# Altium PCB GIC_G1.PcbDoc
Units mm, origin at the board's own origin, x right, y up, seen from the top; angles counter-clockwise.
Board outline 50 x 50 mm, 2 copper layers (Top Layer, Bottom Layer); 13 components, 9 nets, 38 pads, 0 vias.
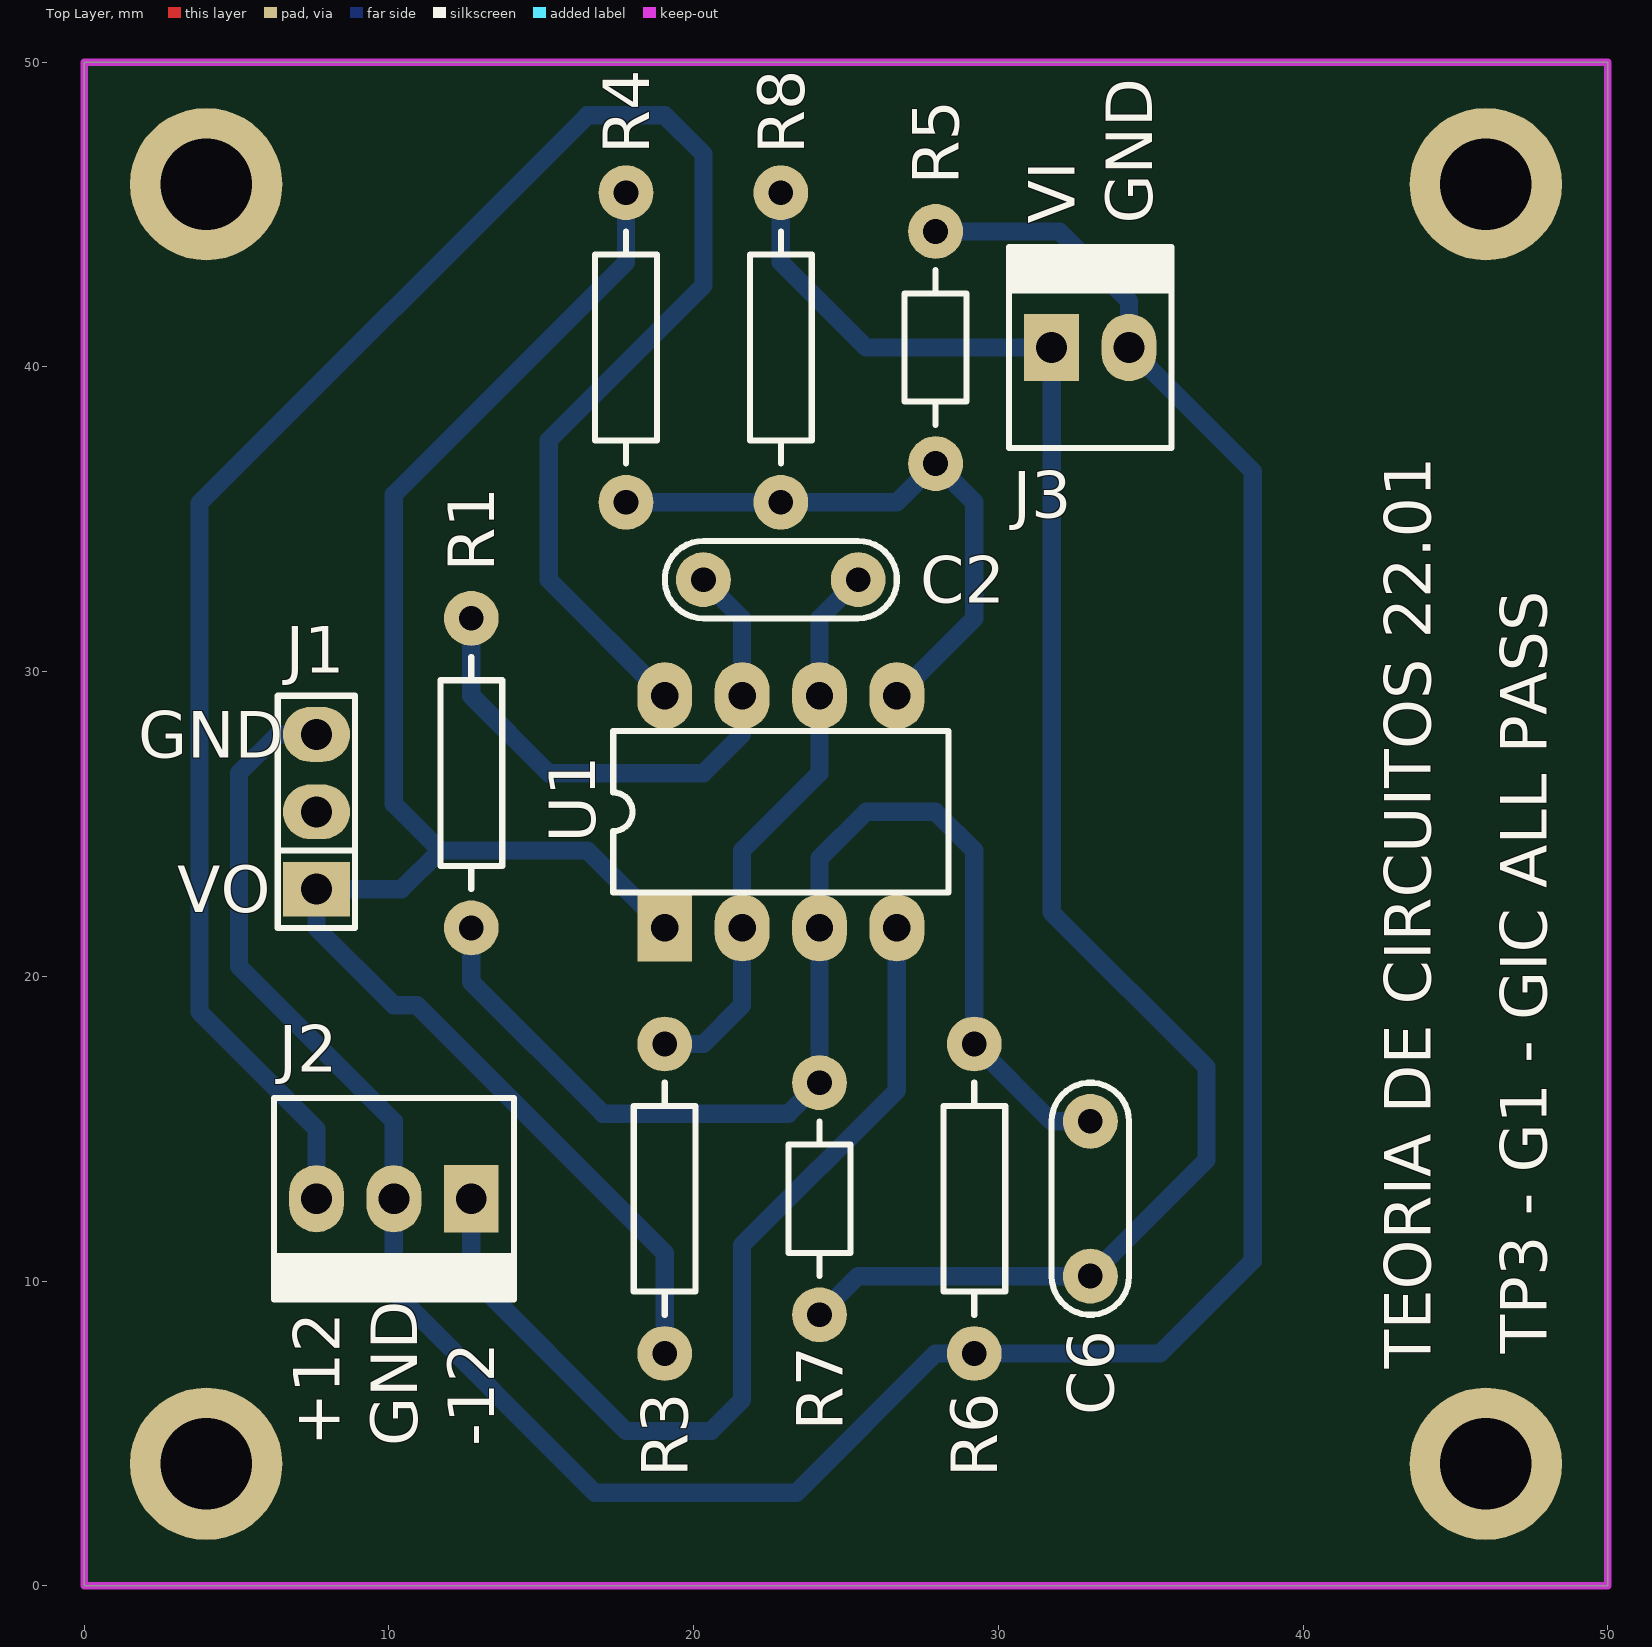
[diagram p0: Top Layer view]
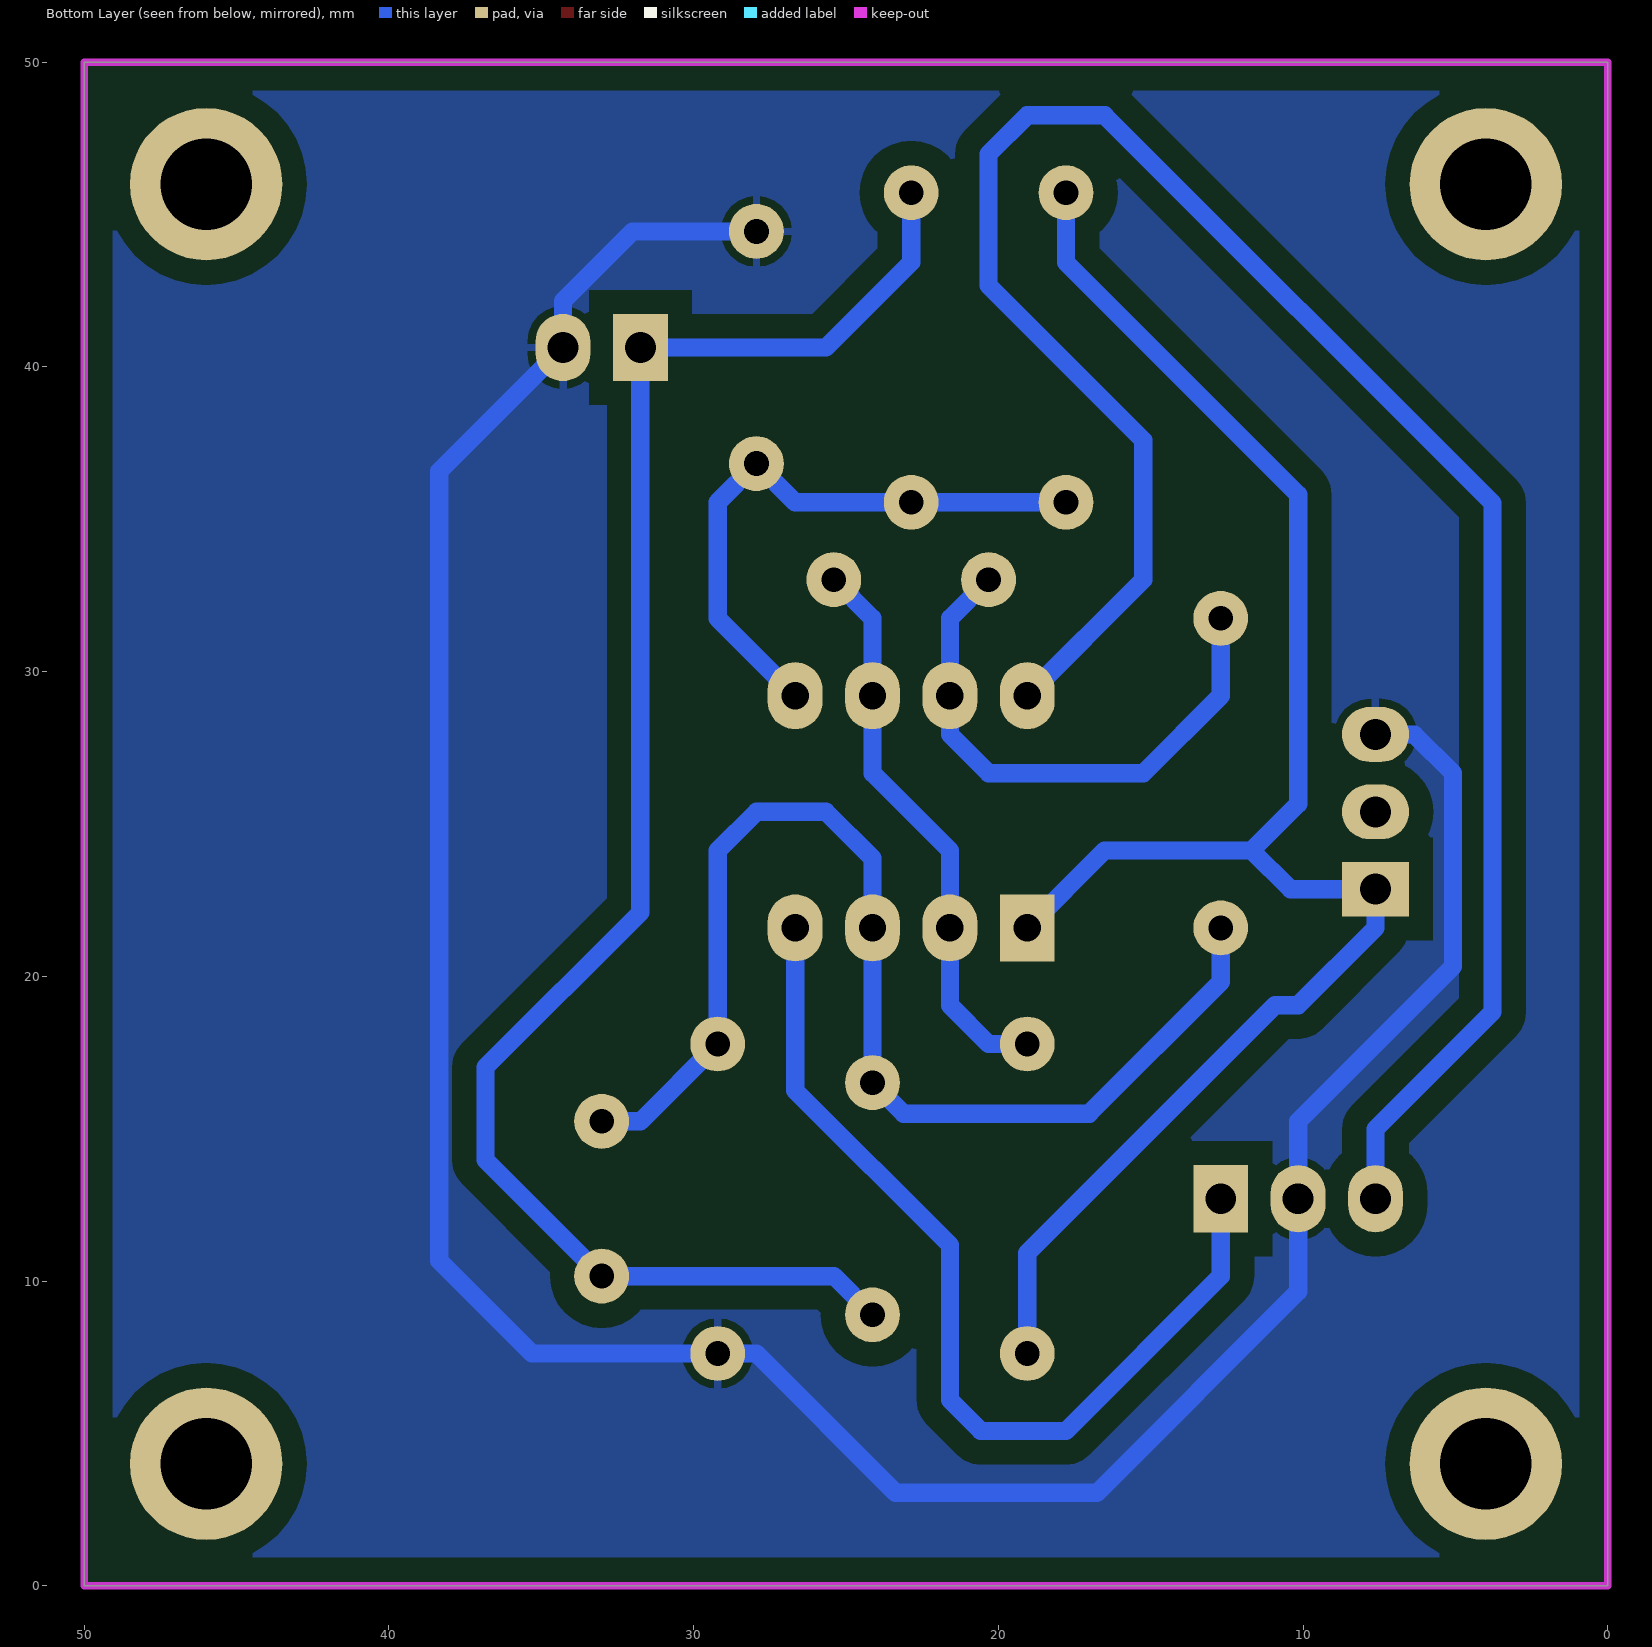
[diagram p1: Bottom Layer view, seen from below]
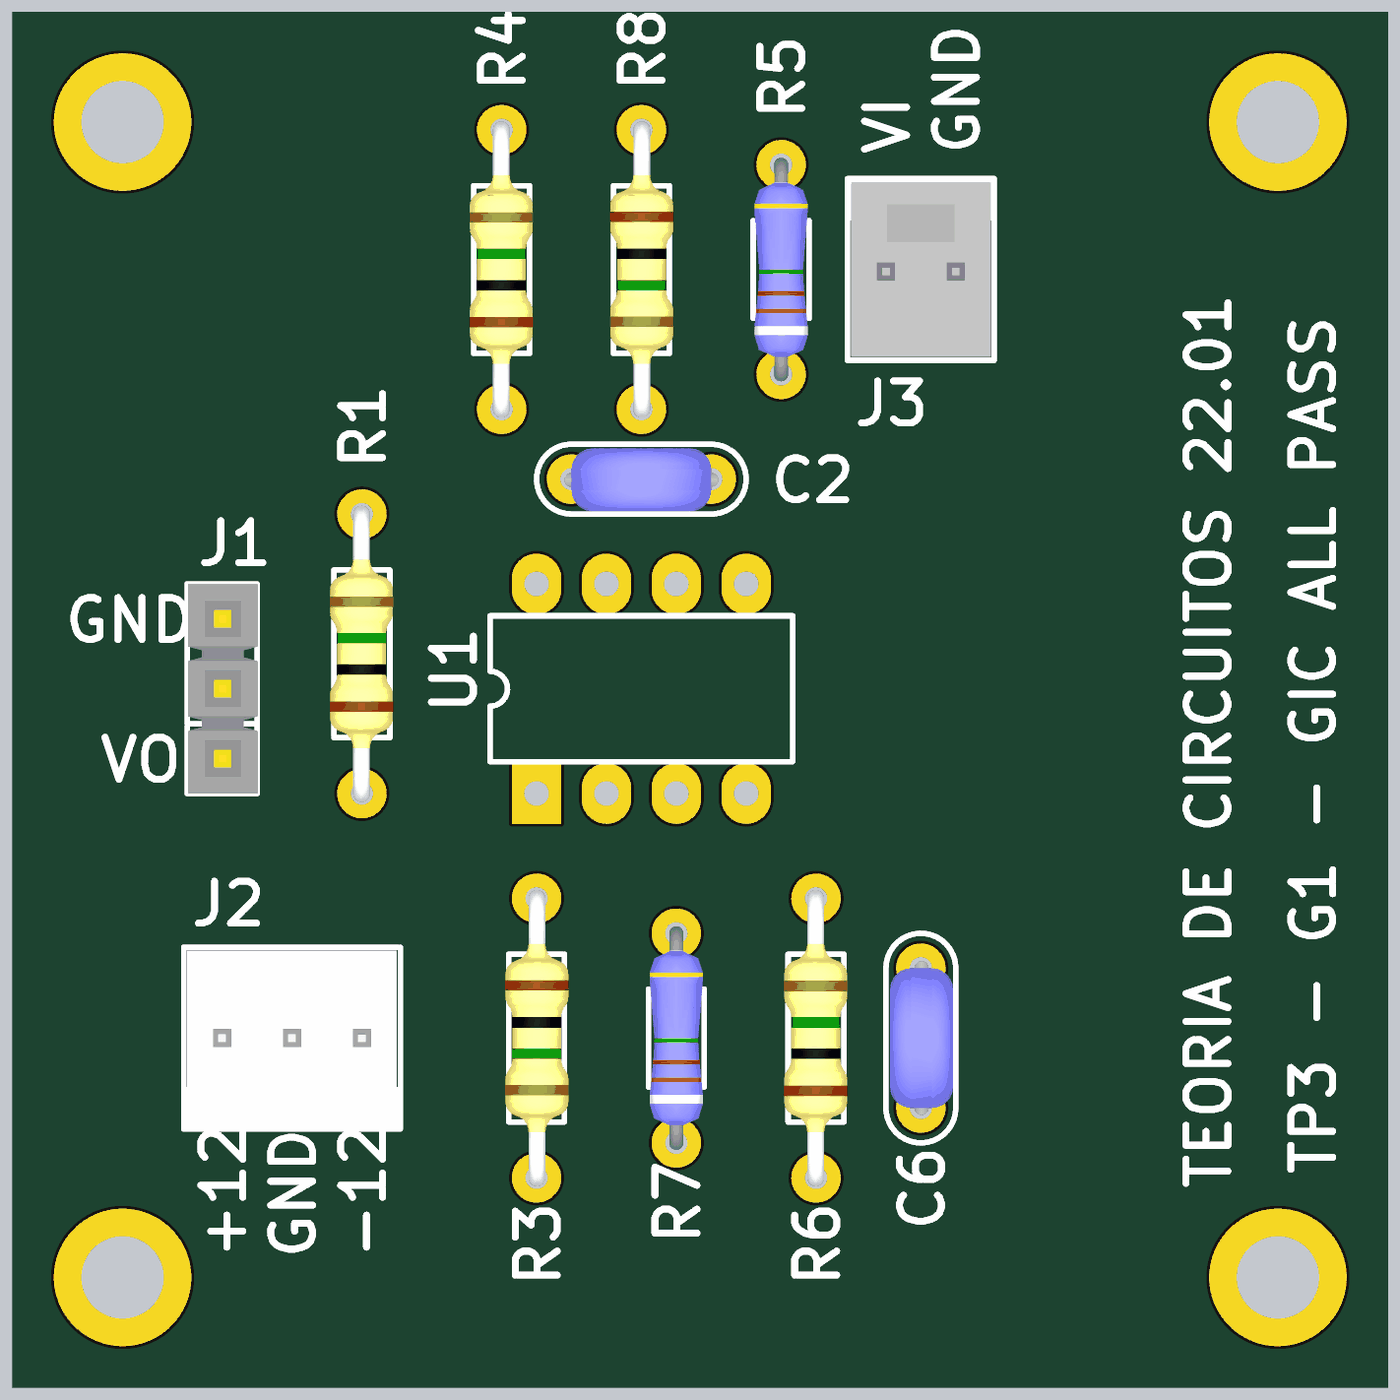
[diagram p2: 3D render of the assembled board from above, using the file's embedded part models]

## Layer stack, top to bottom
Top Solder: solder mask 0.0102, Solder Resist, Dk 3.5
Top Layer: signal copper 0.0356
Dielectric 1: dielectric 0.32, FR-4, Dk 4.8
Bottom Layer: signal copper 0.0356
Bottom Solder: solder mask 0.0102, Solder Resist, Dk 3.5

## Board outline
0,0 0,50 50,50 50,0

## Design rules (kind name [scope] priority, off if disabled: settings)
Clearance [All] p1: gap=0.7
PolygonConnect [All] p1: connectstyle=Relief reliefconductorwidth=0.254 reliefentries=4 polygonreliefangle="90 Angle" airgapwidth=0.254
RoutingVias [All] p1: holewidth=0.711 width=1.27 viastyle="Through Hole" minholewidth=0.711 minwidth=1.27 maxholewidth=0.711 maxwidth=1.27
SolderMaskExpansion [All] p1: expansion=0.102
Width [All] p1: maxlimit=0.6 minlimit=0.6 preferedwidth=0.6
30 further rules are at their usual default settings.

## Components (designator, comment, footprint, x,y, rotation, side; value= is the part's Value field where it differs from the comment)
C2 "220nF" CAP200 22.86,33.02 r0 top
C6 "220nF" CAP200 33.02,12.7 r90 top
J1 "OUT" SIP3 7.62,25.4 r90 top
J2 "FUENTE" MOLEX3 12.7,12.7 r180 top
J3 "V_IN" MOLEX2 31.75,40.64 r0 top
R1 "330" RES400 12.7,21.59 r90 top
R3 "330" RES400 19.05,17.78 r270 top
R4 "330" RES400 17.78,35.56 r90 top
R5 "270K" RES300 27.94,36.83 r90 top
R6 "330" RES400 29.21,7.62 r90 top
R7 "470K" RES300 24.13,8.89 r90 top
R8 "330" RES400 22.86,45.72 r270 top
U1 "LM833N" DIP8 22.86,25.4 r0 top

## Footprints (in the part's own frame and the unit in brackets; to place one, negate y for a bottom-side part, rotate by r counter-clockwise, add the part's x,y. Pads: shape width x height; smd on the part's side, far side on the other; paste and mask are expansions set on the pad)
CAP200 [mm]
  round 1.8 hole 0.813: 1(-2.54,0) 2(2.54,0)
  silkscreen extent -3.81,-1.27 3.81,1.27, body extent -2.79,-1.17 2.79,1.12, height 6.24
DIP8 [mm] "DIP; 8 Leads; Row Spacing 7.62 mm; Pitch 2.54 mm"
  rect 1.8x2.2 hole 0.9: 1(-3.81,-3.81)
  oval 1.8x2.2 hole 0.9: 2(-1.27,-3.81) 3(1.27,-3.81) 4(3.81,-3.81) 5(3.81,3.81) 6(1.27,3.81) 7(-1.27,3.81) 8(-3.81,3.81)
  silkscreen extent -5.5,-2.65 5.5,2.65
MOLEX2 [mm]
  rect 1.8x2.2 hole 1.016: 1(0,0)
  oval 1.8x2.2 hole 1.016: 2(2.54,0)
  silkscreen extent -1.4,-3.3 3.94,3.3, body extent -1.27,-3.17 3.81,3.17, height 10.74
MOLEX3 [mm]
  rect 1.8x2.2 hole 1.016: 1(0,0)
  oval 1.8x2.2 hole 1.016: 2(2.54,0) 3(5.08,0)
  silkscreen extent -1.4,-3.3 6.48,3.3, body extent -1.27,-3.17 6.35,3.18, height 10.74
RES300 [mm]
  round 1.8 hole 0.813: 1(0,0) 2(7.62,0)
  silkscreen extent 1.27,-1.02 6.35,1.02, body extent -0.25,-0.97 7.87,0.97, height 2.01
RES400 [mm]
  round 1.8 hole 0.813: 1(0,0) 2(10.16,0)
  silkscreen extent 1.27,-1.02 8.89,1.02, body extent -0.3,-1.14 10.46,1.17, height 2.43
SIP3 [mm]
  rect 1.8x2.2 hole 1.016: 1(-2.54,0)
  oval 1.8x2.2 hole 1.016: 2(0,0) 3(2.54,0)
  silkscreen extent -3.81,-1.27 3.81,1.27, body extent -3.81,-1.3 3.81,1.24, height 8.38

## Part data
C2 C6: library part CAP
J1: library part CON3
J2: library part MOLEX3
J3: library part MOLEX2
R1 R3 R4 R5 R6 R7 R8: library part RES
U1: "Low-Noise Dual Operational Amplifier"

## Free pads (board coordinates)
  round 5 hole 3: 0(4,4) 1(4,46) 2(46,4) 3(46,46)

## Nets (pads, with @x,y where several pads share a name; then routed paths per layer and width w, separated by ;. In a path a pad name is that pad's centre, name@x,y a point inside that pad or via, vN(x,y) a via of type N, cw(c..) or ccw(c..) an arc to the next point about the centre after c; other vN are vias at no path point)
+12: J2.3 U1.8 | length 68.2
  Bottom Layer w0.6: J2.3 7.62,14.986 3.78,18.826 3.78,35.53 16.51,48.26 19.05,48.26 20.32,46.99 20.32,42.672 15.24,37.592 15.24,33.02 U1.8
-12: J2.1 U1.4 | length 31.6
  Bottom Layer w0.6: J2.1 12.7,10.16 17.78,5.08 20.574,5.08 21.59,6.096 21.59,11.176 26.67,16.256 U1.4
GND: J1.3 J2.2 J3.2 R5.2 R6.1 | length 96.8
  Bottom Layer w0.6: J1.3 6.35,27.94 5.08,26.67 5.08,20.32 10.16,15.24 J2.2 10.16,9.652 16.764,3.048 23.368,3.048 27.94,7.62 35.306,7.62 38.354,10.668 38.354,36.576 J3.2 34.29,42.164 32.004,44.45 R5.2
NetC2_1: C2.1 R1.2 U1.7 | length 18.6
  Bottom Layer w0.6: R1.2 12.7,29.21 15.24,26.67 20.32,26.67 21.59,27.94 U1.7 21.59,31.75 C2.1
NetC2_2: C2.2 R3.1 U1.2 U1.6 | length 18.6
  Bottom Layer w0.6: R3.1 20.32,17.78 21.59,19.05 U1.2 21.59,24.13 24.13,26.67 U1.6 24.13,31.75 C2.2
NetC6_1: C6.1 J3.1 R7.1 R8.1 | length 55.9
  Bottom Layer w0.6: R8.1 22.86,43.434 25.654,40.64 J3.1 31.75,22.098 36.83,17.018 36.83,13.97 C6.1 25.4,10.16 R7.1
NetC6_2: C6.2 R1.1 R6.2 R7.2 U1.3 | length 40.2
  Bottom Layer w0.6: R1.1 12.7,19.812 17.018,15.494 23.114,15.494 R7.2 U1.3 24.13,23.876 25.654,25.4 27.94,25.4 29.21,24.13 R6.2 31.75,15.24 C6.2
NetJ1_1: J1.1 R3.2 R4.2 U1.1 | length 58.8
  Bottom Layer w0.6: R4.2 17.78,43.434 10.16,35.814 10.16,25.654 11.684,24.13 ; R3.2 19.05,10.922 10.922,19.05 10.16,19.05 7.62,21.59 J1.1 10.414,22.86 11.684,24.13 ; U1.1 16.51,24.13 11.684,24.13
NetR4_1: R4.1 R5.1 R8.2 U1.5 | length 19.9
  Bottom Layer w0.6: R4.1 R8.2 26.67,35.56 R5.1 29.21,35.56 29.21,31.75 U1.5
pads on no net: J1.2

## Polygon pours and split planes (outlines as drawn)
GND on Bottom Layer "Top Overlay-No Net" (solid, remove dead copper, pour order 3): 0,50 50,50 50,0 0,0

## Keep-outs
Keep-Out Layer:
  the board outline again, w0.254

## Silkscreen, mask and mechanical layers (free items; w line width, h text height)
Top Overlay:
  text "VI" at 32.512,44.704 h1.52 r90
  text "GND" at 35.052,44.704 h1.52 r90
  text "GND" at 1.778,27.178 h1.52
  text "VO" at 3.048,22.098 h1.52
  text "TP3 - G1 - GIC ALL PASS" at 48.006,7.62 h1.52 r90
  text "TEORIA DE CIRCUITOS 22.01" at 44.196,7.112 h1.52 r90
  text "+12" at 8.382,4.572 h1.52 r90
  text "GND" at 10.922,4.572 h1.52 r90
  text "-12" at 13.462,4.572 h1.52 r90